# Altium PCB main.PcbDoc (part 2 of 2)
Units mm, origin at the board's own origin, x right, y up, seen from the top; angles counter-clockwise.
Board outline 39.94 x 40 mm, 2 copper layers (Top Layer, Bottom Layer), stack 1.571 mm thick; 56 components, 40 nets, 199 pads, 485 vias.
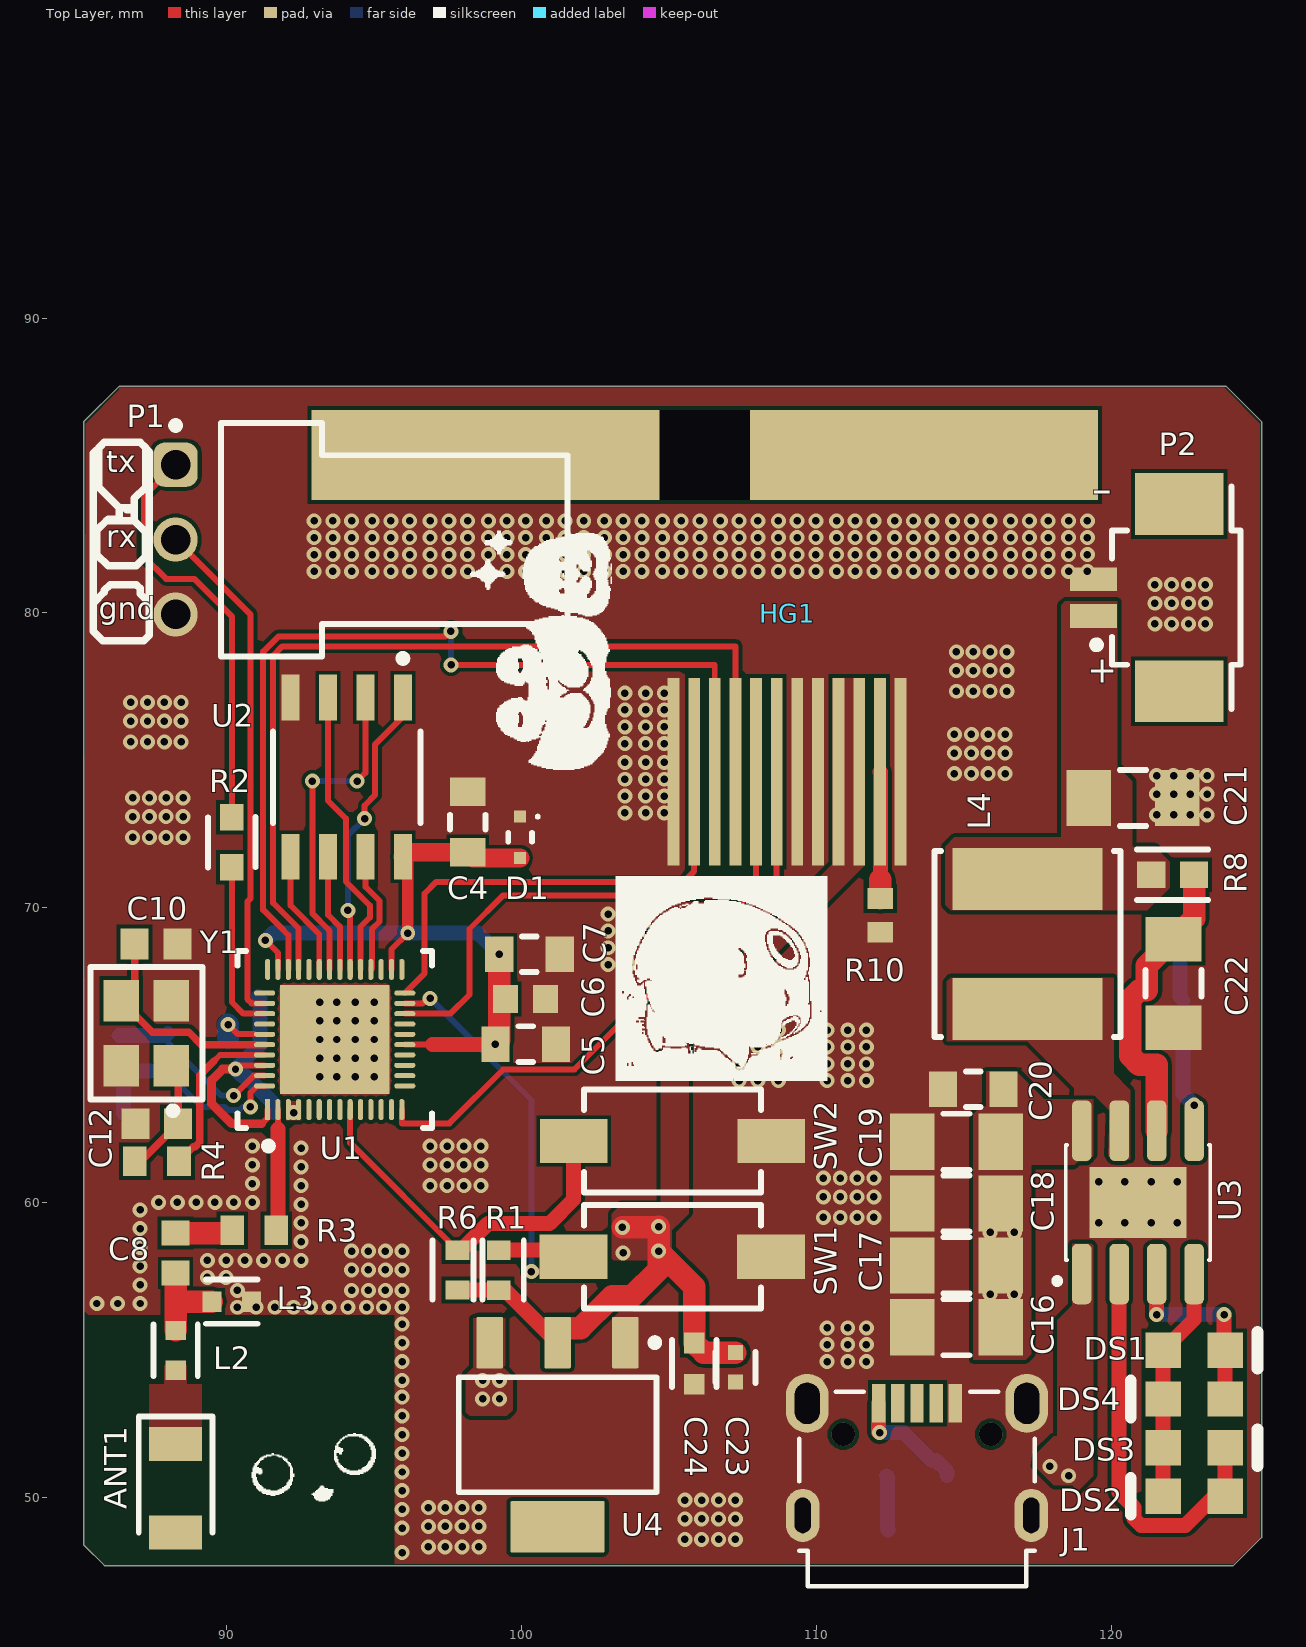
[diagram p0: Top Layer view]

## Polygon pours and split planes (outlines as drawn)
GND on Top Layer "NONET_L-01_P-001" (solid, remove dead copper, pour order 21): 85.217,86.423 86.36,87.566 86.36,87.63 123.825,87.63 125.031,86.423 125.031,48.641 124.142,47.752 95.694,47.752 95.694,56.197 85.153,56.197
VCC on Top Layer "NONET_L-01_P-001" (solid, pour order 19): 110.553,77.787 111.633,77.787 111.633,71.438 105.664,65.468 105.664,59.627 104.838,58.801 104.775,58.864 103.06,58.864 103.06,59.627 103.378,59.944 104.712,59.944 104.712,65.659 110.553,71.501
VCC on Top Layer "NONET_L-01_P-001" (solid, pour order 17): 105.093,58.039 105.093,59.563 105.029,59.627 103.06,59.627 103.06,58.102 103.124,58.039
"5V OUT" on Top Layer "NONET_L-01_P-001" (solid, pour order 16): 98.361,56.07 98.361,54.419 98.108,54.165 98.108,52.895 98.234,52.768 99.504,52.768 99.695,52.959 99.695,54.102 99.377,54.419 99.441,54.483 99.441,56.07
+5_CHRG on Top Layer "NONET_L-01_P-001" (solid, pour order 14): 117.475,51.498 118.046,52.07 118.173,52.07 118.173,56.007 118.681,56.515 118.681,58.61 119.316,58.61 119.38,58.547 119.38,50.736 118.872,50.228 118.681,50.419 118.046,50.419 117.411,51.054
BAT on Top Layer "NONET_L-01_P-001" (solid, pour order 11): 120.206,80.391 120.206,74.803 120.713,74.295 120.713,72.072 121.475,72.072 121.983,71.564 121.983,70.675 121.221,69.913 114.554,69.913 114.364,70.104 114.364,72.072 114.681,72.39 118.3,72.39 118.3,80.264 118.427,80.391
NetL4_1 on Top Layer "NONET_L-01_P-001" (solid, pour order 10): 119.888,61.468 120.65,61.468 120.65,63.817 120.078,64.389 120.078,67.627 114.554,67.627 114.427,67.501 114.427,65.468 117.157,65.468 118.745,63.881 118.745,63.627 119.444,63.627 119.951,63.119 119.951,63.055
"5V OUT" on Top Layer "NONET_L-01_P-001" (solid, pour order 9): 115.76,64.453 115.76,63.246 115.57,63.246 115.316,62.992 115.316,54.673 117.094,54.673 117.284,54.864 117.284,61.277 118.745,61.277 118.872,61.404 119.189,61.404 119.38,61.595 119.38,63.5 117.729,63.5 116.776,64.453
NetL1_2 on Top Layer "NONET_L-01_P-001" (solid, pour order 2): 92.011,63.436 92.519,63.436 92.519,62.801 92.011,62.801
NetANT1_1 on Top Layer "NONET_L-01_P-001" (solid, pour order 0): 87.884,54.483 88.646,54.483 88.646,53.848 89.154,53.848 89.154,52.324 87.376,52.324 87.376,53.848 87.884,53.848
"5V OUT" on Bottom Layer "NONET_L-01_P-001" (solid, pour order 15): 115.316,59.436 117.221,59.436 117.221,56.515 117.157,56.451 103.188,56.451 99.568,52.832 98.234,52.832 98.234,54.102 101.663,57.531 115.316,57.531
GND on Bottom Layer "NONET_L-01_P-001" (solid, remove dead copper, pour order 20): 85.217,86.423 86.36,87.566 86.36,87.63 123.825,87.63 125.031,86.423 125.031,48.641 124.142,47.752 95.694,47.752 95.694,56.197 85.153,56.197
VCC on Bottom Layer "NONET_L-01_P-001" (solid, pour order 18): 103.06,59.627 103.06,58.039 105.093,58.039 105.093,63.627 99.251,69.469 95.822,69.469 95.822,68.834 98.87,65.786 98.87,65.278 99.123,65.024 99.822,65.024
+5_CHRG on Bottom Layer "NONET_L-01_P-001" (solid, pour order 13): 114.998,49.974 116.205,49.974 116.776,50.546 117.983,50.546 118.808,49.721 118.872,49.784 121.412,49.784 121.73,50.102 121.73,51.054 118.681,51.054 118.237,51.498 114.998,51.498
VCC on Bottom Layer "NONET_L-01_P-001" (solid, pour order 8): 89.789,64.135 91.186,64.135 91.186,65.087 91.567,65.468 91.504,65.532 91.504,67.882 92.266,68.644 92.266,69.278 92.075,69.469 91.376,69.469 90.361,68.453 90.361,65.722 90.297,65.722 89.789,65.215

## Silkscreen, mask and mechanical layers (free items; w line width, h text height)
Top Overlay:
  drawing of 57 lines, arcs and shapes, not listed
  text "tx" at 85.915,84.519 h1.27
  text "-" at 119.316,83.084 h2.54
  text "rx" at 85.915,81.978 h1.27
  text "gnd" at 85.661,79.525 h1.27
  text "+" at 119.189,77.329 h1.52
Bottom Overlay:
  drawing of 123 lines, arcs and shapes, not listed
  text "made by" at 107.315,52.476 h2.03
  text "@madjogger" at 107.251,50.952 h2.03
Mechanical 1:
  lines w0.254: 85.153,69.215 85.153,61.595 85.153,48.387 ; 85.852,47.688 124.142,47.688 125.095,48.641 125.095,86.487 ; 85.915,47.625 85.153,48.387 ; 123.888,87.694 86.36,87.694 85.153,86.487 85.153,48.387

## Text inside footprints (layer, text, board x,y; h text height)
HG1: Bottom Overlay "7" at 106.935,57.034 h2.92; Bottom Overlay "S" at 97.346,61.967 h2.92; Bottom Overlay "9" at 102.549,57.034 h2.92; Bottom Overlay "I" at 100.086,61.967 h2.92; Bottom Overlay "0" at 102.827,61.967 h2.92; Bottom Overlay "P" at 99.538,61.967 h2.92; Bottom Overlay "8" at 104.742,57.034 h2.92; Bottom Overlay "4" at 105.02,61.967 h2.92; Bottom Overlay "2" at 116.257,61.967 h2.92; Bottom Overlay "*" at 108.857,61.967 h2.92; Bottom Overlay "0" at 111.324,61.967 h2.92; Bottom Overlay "4" at 113.79,61.967 h2.92; Bottom Overlay "T" at 111.32,57.034 h2.92; Bottom Overlay "S" at 113.787,57.034 h2.92; Bottom Overlay "2" at 107.486,61.967 h2.92; Bottom Overlay "7" at 109.127,57.034 h2.92; Bottom Overlay "12" at 104.479,74.103 h1 r90; Bottom Overlay "1" at 114.385,73.341 h1 r90
J1: Top 3D Body "PCB Edge" at 112.111,46.992 h0.41